# Altium PCB MAINBOARD.PcbDoc
Units mm, origin at the board's own origin, x right, y up, seen from the top; angles counter-clockwise.
Board outline 139.93 x 91.03 mm, 2 copper layers (Top Layer, Bottom Layer); 29 components, 56 nets, 161 pads, 43 vias.
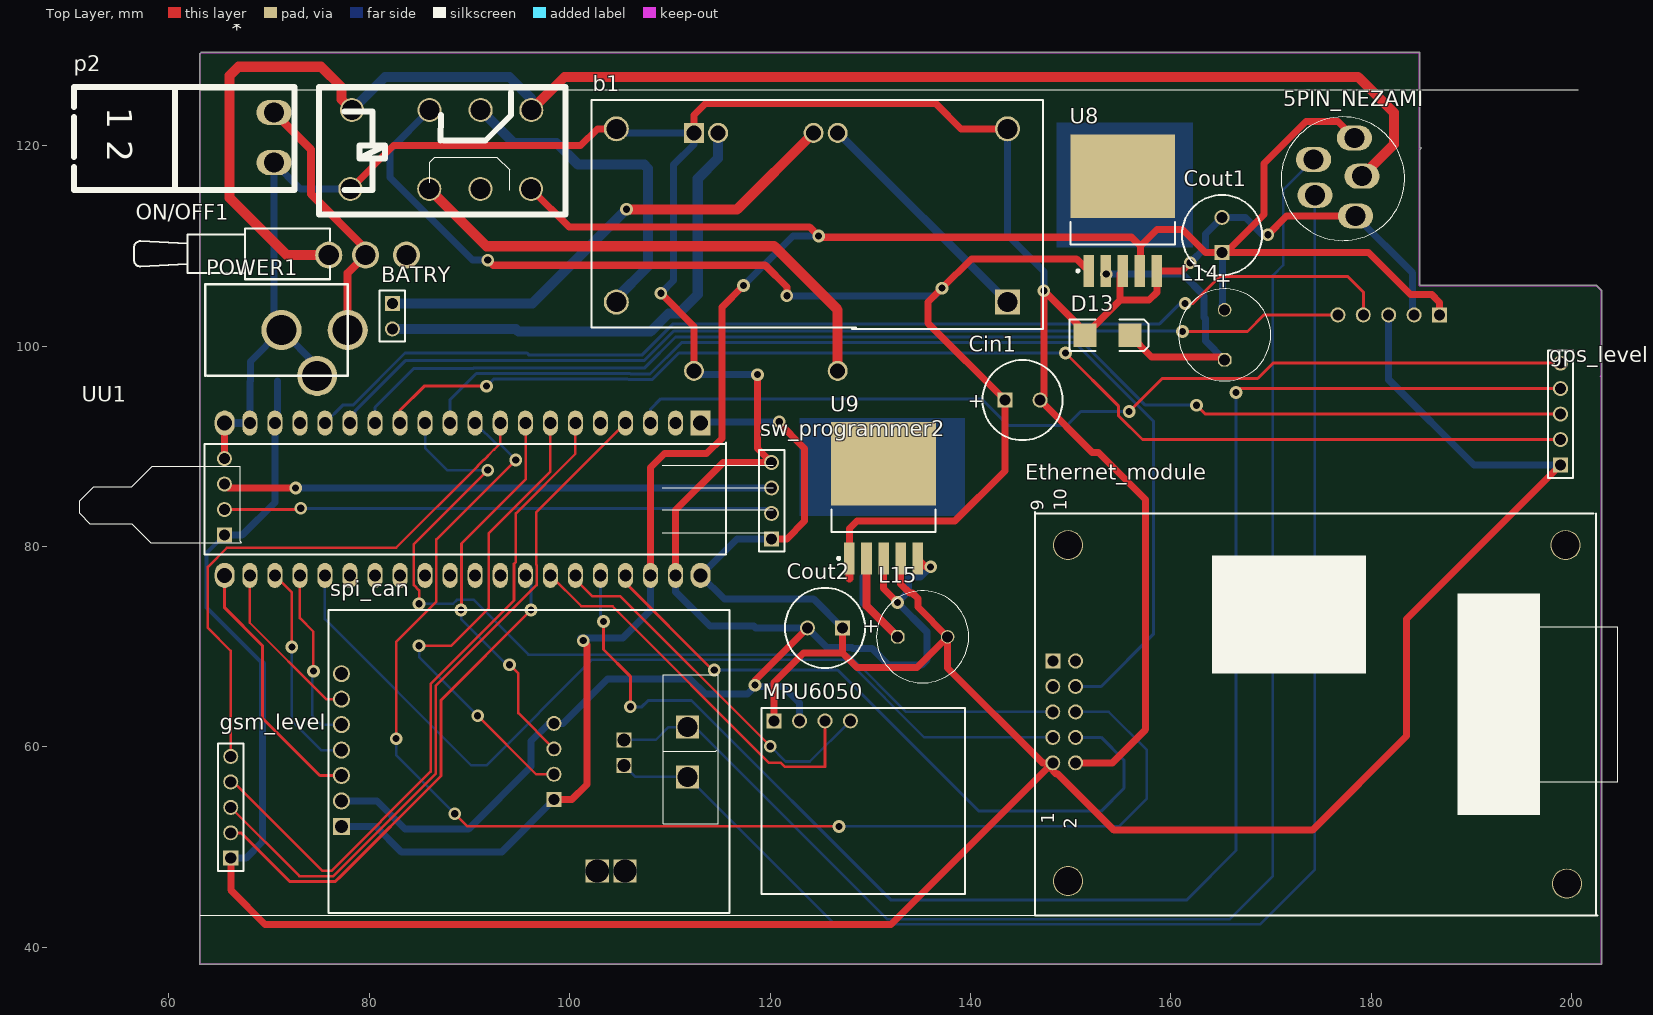
[diagram p0: Top Layer view]
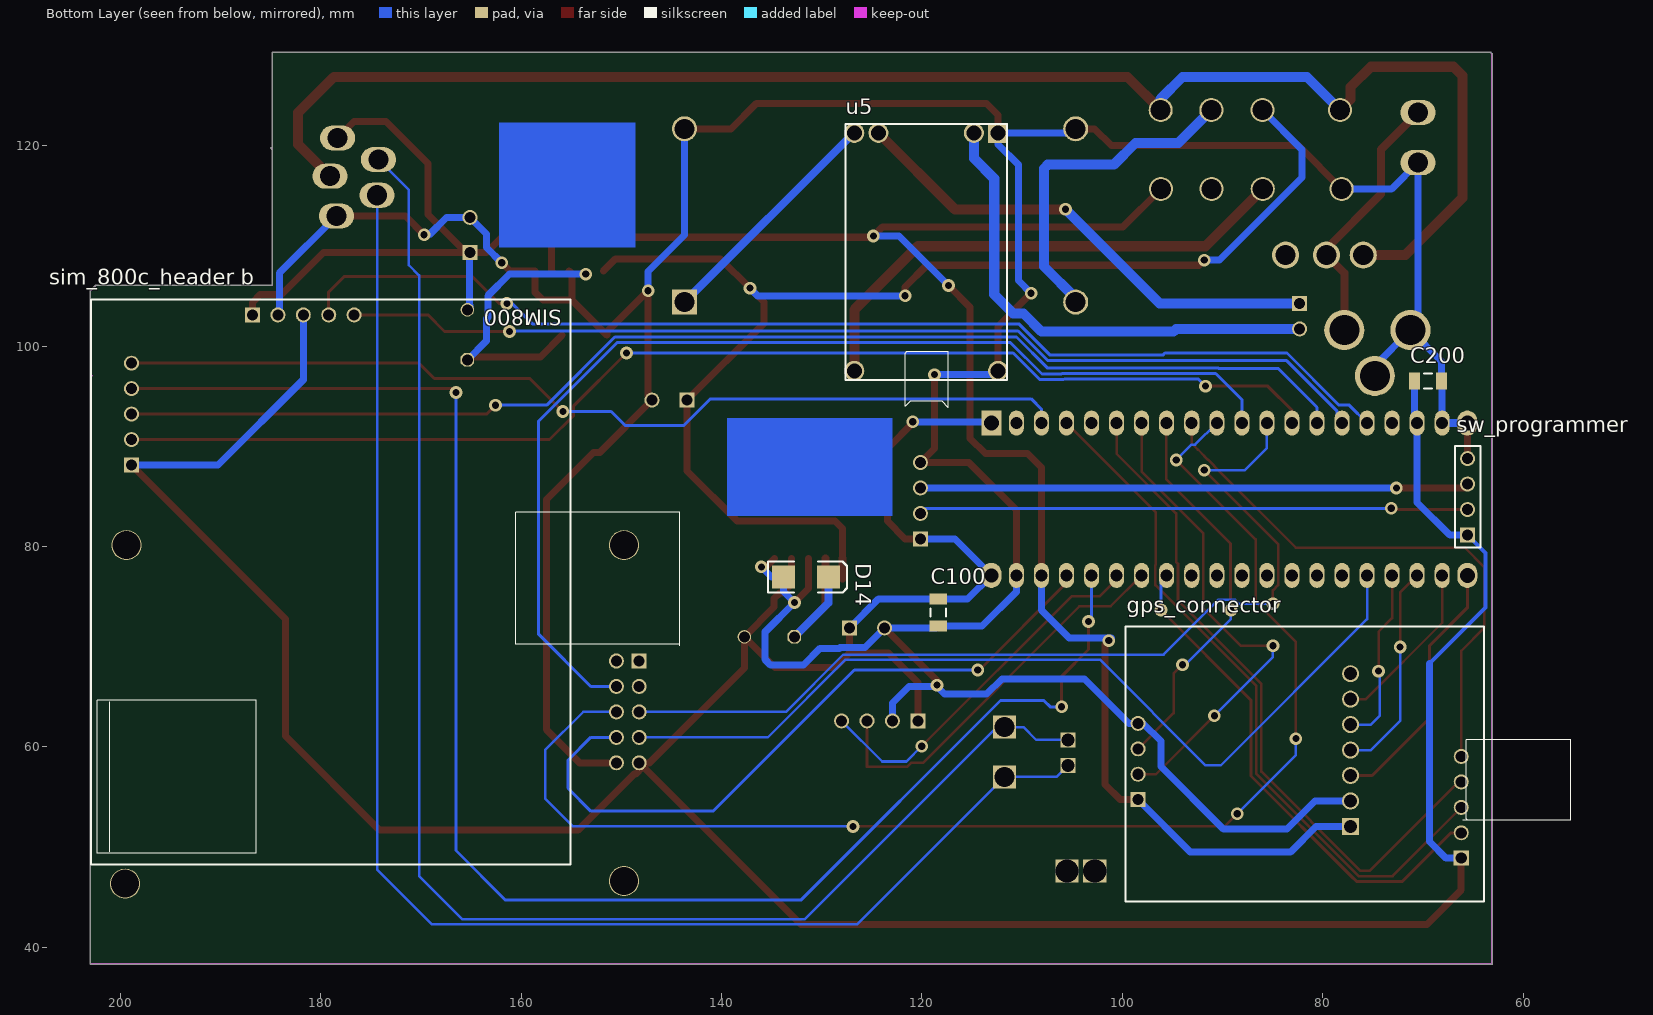
[diagram p1: Bottom Layer view, seen from below]

## Layer stack, top to bottom
Top Solder: solder mask 0.0102, Solder Resist, Dk 3.5
Top Layer: signal copper 0.0356
Dielectric 1: dielectric 0.32, FR-4, Dk 4.8
Bottom Layer: signal copper 0.0356
Bottom Solder: solder mask 0.0102, Solder Resist, Dk 3.5

## Board outline
63.069,38.354 ccw(c63.119,38.354) 63.119,38.304 202.946,38.304 ccw(c202.946,38.354) 202.996,38.354 202.996,105.537 ccw(c202.946,105.537) 202.981,105.573 202.982,105.573 202.474,106.081 202.474,106.08 ccw(c202.438,106.045) 202.438,106.095 184.835,106.095 184.835,119.613 184.948,119.725 ccw(c184.912,119.761) 184.962,119.761 ccw(c184.912,119.761) 184.876,119.797 184.835,119.756 184.835,129.286 ccw(c184.785,129.286) 184.785,129.336 63.246,129.336 ccw(c63.246,129.286) 63.21,129.321 63.21,129.322 63.083,129.195 63.084,129.195 ccw(c63.119,129.159) 63.069,129.159

## Design rules (kind name [scope] priority, off if disabled: settings)
Clearance Clearance_3 [InNamedPolygon('1')] p1: gap=0.4 ignorepadtopadclearanceinfootprint=FALSE
Clearance Clearance_2 [InNamedPolygon('1')] p2: gap=0.4 ignorepadtopadclearanceinfootprint=FALSE
Clearance Clearance_1 [InNamedPolygon('Top Layer-No Net')] p3: gap=0.4 ignorepadtopadclearanceinfootprint=FALSE
Clearance [All] p4: gap=0.254 ignorepadtopadclearanceinfootprint=FALSE
PolygonConnect [All] p1: connectstyle=Relief reliefconductorwidth=0.254 reliefentries=4 polygonreliefangle="90 Angle" airgapwidth=0.254
RoutingVias [All] p1: holewidth=0.711 width=1.27 viastyle="Through Hole" minholewidth=0.711 minwidth=1.27 maxholewidth=0.711 maxwidth=1.27
SolderMaskExpansion [All] p1: expansion=0.102
Width Width_1 [InNet('GND') OR InNet('3.3V')   OR InNet('VBAT')  OR InNet('V12')] p1: maxlimit=1 minlimit=0.4 preferedwidth=0.8 minimp=50.000000 maximp=50.000000 favimp=50.000000
Width [All] p2: maxlimit=1 minlimit=0.254 preferedwidth=0.8 minimp=50.000000 maximp=50.000000 favimp=50.000000
30 further rules are at their usual default settings.

## Components (designator, comment, footprint, x,y, rotation, side; value= is the part's Value field where it differs from the comment)
5PIN_NEZAMI "5PIN_NEZAMI" 5PIN_NEZAMI_CAN 172.466,115.062 r270 top
* "raly_2c" RELAY12-2c-HJR1-2C 71.907,115.062 r90 top
b1 "booster" booster 143.048,104.394 r180 top
BATRY "BATTRY" HDR1X2 82.296,104.267 r270 top
C100 "100nF" 1206 118.364,73.406 r270 bottom
C200 "100nF" 1206 69.469,96.52 r180 bottom
Cin1 "470 μF; 25 V" E 145.189,94.615 r0 top value=100uF
Cout1 "220 μF; 25 V" E 165.1,111.097 r90 top value=100uF
Cout2 "220 μF; 25 V" E 125.476,71.882 r180 top value=100uF
D13 "SM5822" SMB 153.67,101.092 r0 top
D14 "SM5822" SMB 131.572,76.962 r180 bottom
Ethernet_module "Ethernet_module" ethernet_module 151.511,66.929 r90 top
gps_connector "gps_connector" GPS_PORT_MODULE 98.425,54.737 r90 bottom
gps_level "Header 5" HDR1X5 198.882,88.138 r90 top
gsm_level "Header 5" HDR1X5 66.167,48.895 r90 top
L14 "68uH 3.1A (47 33)" CAPR5-4X5 165.354,101.132 r90 top value=10mH
L15 "68uH 3.1A (47 33)" CAPR5-4X5 135.215,70.993 r0 top value=10mH
MPU6050 "MPU6050" mpu6050 120.396,62.611 r0 top
ON/OFF1 "SW-SPDT" TL36WW15050 76.073,109.22 r180 top
p2 "V12_phonix" "phoenix terminal R 2" 50.546,125.89 r270 top
POWER1 "POWER" POWERIN 71.247,101.6 r90 top
"sim_800c_header b" "sim_800c_header b" SIM800_MODULE 179.197,52.451 r180 bottom
spi_can "spi module" SPI_CAN 77.216,52.07 r90 top
sw_programmer "" HDR1X4 65.532,81.153 r90 bottom
sw_programmer2 "" HDR1X4 120.142,80.772 r90 top
u5 "charger" CHARGER 114.427,116.459 r0 bottom
U8 "LM2596S-5" TS5B_N 155.194,113.517 r90 top
U9 "LM2596S-3.3" TS5B_N 131.318,84.815 r90 top
UU1 "STM32F103C8T6" header_board_st_40 113.065,92.329 r270 top

## Footprints (in the part's own frame and the unit in brackets; to place one, negate y for a bottom-side part, rotate by r counter-clockwise, add the part's x,y. Pads: shape width x height; smd on the part's side, far side on the other; paste and mask are expansions set on the pad)
5PIN_NEZAMI_CAN [mm]
  oval 2.5x3.5 hole 2: 1(-1.905,6.604) 2(-5.715,5.842) 3(-3.556,1.778) 4(0,1.905) 5(2.065,5.969)
  silkscreen extent -7.82,-1.46 4.51,10.86
1206 [mm] "Chip Capacitor, Body 3.2x1.6mm, IPC High Density"
  rect 1.1x1.7 smd: 1(-1.35,0) 2(1.35,0)
  silkscreen extent -0.4,-0.75 0.4,0.75, body extent -1.7,-0.9 1.7,0.9, height 1.3
booster [mm]
  rect 2.5x2.5 hole 2: 1(-0.635,0)
  round 2.5 hole 2: 2(-0.635,-17.3) 3(38.4,0) 4(38.4,-17.3)
  silkscreen extent -4.19,-20.19 40.89,2.67
CAPR5-4X5 [mm]
  oct 1.35x1.35 hole 1.1: 1(-2.5,0)
  round 1.35 hole 1.1: 2(2.5,0)
  silkscreen extent -4.6,-4.6 4.6,4.6
CHARGER [mm]
  round 2 hole 1.5: 1(-2.032,18.923) 2(12.319,18.923) 3(12.319,-4.826) 4(9.906,-4.826) 5(0.381,-4.826)
  rect 2x2 hole 1.5: 6(-2.032,-4.826)
  silkscreen extent -2.92,-5.71 13.21,22.61
E [mm]
  rect 1.5x1.5 hole 1.1: 1(-1.75,0)
  round 1.5 hole 1.1: 2(1.75,0)
  silkscreen extent -4,-4 4,4
ethernet_module [mm] "Connector; Header; 5x2 Position"
  rect 1.5x1.5 hole 1.1: 1(1.651,3.302)
  round 1.5 hole 1.1: 2(1.651,1.016) 3(-0.889,3.302) 4(-0.889,1.016) 5(-3.429,3.302) 6(-3.429,1.016) 7(-5.969,3.302) 8(-5.969,1.016) 9(-8.509,3.302) 10(-8.509,1.016)
  round 3 hole 2.8: 11(-20.574,-48.006) 11(-20.32,1.778) 11(13.208,1.778) 11(13.208,-47.879)
  silkscreen extent -23.75,-53.09 16.51,5.08
GPS_PORT_MODULE [mm] "Connector; Header; 4 Position"
  rect 1.5x1.5 hole 1.1: 1(0,0)
  round 1.5 hole 1.1: 2(2.54,0) 3(5.08,0) 4(7.62,0)
  silkscreen extent -10.16,-43.18 17.27,1.27
HDR1X2 [mm] "Connector; Header; 2 Position"
  rect 1.5x1.5 hole 1.1: 1(0,0)
  round 1.5 hole 1.1: 2(2.54,0)
  silkscreen extent -1.27,-1.27 3.81,1.27
HDR1X4 [mm] "Connector; Header; 4 Position"
  rect 1.5x1.5 hole 1.1: 1(0,0)
  round 1.5 hole 1.1: 2(2.54,0) 3(5.08,0) 4(7.62,0)
  silkscreen extent -1.27,-1.27 8.89,1.27
HDR1X5 [mm] "Connector; Header; 5 Position"
  rect 1.5x1.5 hole 1.1: 1(0,0)
  round 1.5 hole 1.1: 2(2.54,0) 3(5.08,0) 4(7.62,0) 5(10.16,0)
  silkscreen extent -1.27,-1.27 11.43,1.27
header_board_st_40 [mm]
  rect 2.5x2 hole 1.5: 1(0,0)
  oval 2.5x1.5 hole 1.2: 2(0,-2.5) 3(0,-5) 4(0,-7.5) 5(0,-10) 6(0,-12.5) 7(0,-15) 8(0,-17.5) 9(0,-20) 10(0,-22.5) 11(0,-25) 12(0,-27.5) 13(0,-30) 14(0,-32.5) 15(0,-35) 16(0,-37.5) 17(0,-40) 18(0,-42.5) 19(0,-45) 22(15.2,-45) 23(15.2,-42.5) 24(15.2,-40) 25(15.2,-37.5) 26(15.2,-35) 27(15.2,-32.5) 28(15.2,-30) 29(15.2,-27.5) 30(15.2,-25) 31(15.2,-22.5) 32(15.2,-20) 33(15.2,-17.5) 34(15.2,-15) 35(15.2,-12.5) 36(15.2,-10) 37(15.2,-7.5) 38(15.2,-5) 39(15.2,-2.5)
  oval 2.5x2 hole 1.5: 20(0,-47.5) 21(15.2,-47.5)
  oval 2.5x2 hole 1.4: 40(15.2,0)
  silkscreen extent 1.96,-61.98 13.11,7.24
mpu6050 [mm] "Connector; Header; 8 Position"
  rect 1.5x1.5 hole 1.1: 1(0,0)
  round 1.5 hole 1.1: 2(2.54,0) 3(5.08,0) 4(7.62,0)
  silkscreen extent -1.27,-17.27 19.05,1.27
"phoenix terminal R 2" [mm] "2 Right terminals"
  oval 2.5x3.5 hole 2: 1(2.573,19.939) 2(7.573,19.939)
  silkscreen extent 0,0 10.29,22
POWERIN [mm]
  round 4 hole 3: 1(0.007,-6.593) 2(0.007,0.011) 3(-4.565,-3.545)
  silkscreen extent -4.56,-6.59 4.58,7.63
RELAY12-2c-HJR1-2C [mm]
  round 2.4 hole 2: 1(8.509,-6.35) 4(8.509,-14.097) 6(8.509,-19.202) 8(8.509,-24.257) 9(0.635,-24.232) 11(0.635,-19.177) 13(0.635,-14.072) 16(0.635,-6.198)
  silkscreen extent -1.9,-27.69 10.8,-3.05
SIM800_MODULE [mm] "Connector; Header; 5 Position"
  rect 1.5x1.5 hole 1.1: 1(-7.62,50.673)
  round 1.5 hole 1.1: 2(-5.08,50.673) 3(-2.54,50.673) 4(0,50.673) 5(2.54,50.673)
  silkscreen extent -23.75,-4.19 35.05,52.2
SMB [mm]
  rect 2.3x2.3 smd: 1(-2.25,0) 2(2.25,0)
  silkscreen extent -3.8,-1.55 4.1,1.55
SPI_CAN [mm] "Connector; Header; 8 Position"
  rect 1.7x1.7 hole 1.3: 1(0,0)
  round 1.7 hole 1.3: 2(2.54,0) 3(5.08,0) 4(7.62,0) 5(10.16,0) 6(12.7,0) 7(15.24,0)
  rect 2.3x2.3 hole 2: 8(4.953,-34.544) 9(9.906,-34.544)
  rect 1.5x1.5 hole 1.3: 8(6.096,-28.194) 9(8.636,-28.194)
  rect 2.3x2.3 hole 2.3: 10(-4.445,-25.527) 11(-4.445,-28.321)
  silkscreen extent -8.64,-38.73 21.59,1.27
TL36WW15050 [mm] "Switch; 4 Leads"
  round 2.7 hole 2: 1(0.127,0.127) 2(-3.556,0.127) 3(-7.62,0.127)
  silkscreen extent 0,-2.54 19.56,2.54
TS5B_N [mm]
  rect 3.2x1.05 smd: 1(-6,3.4) 2(-6,1.7) 3(-6,0) 4(-6,-1.7) 5(-6,-3.4)
  rect 8.3x10.45 smd: 6(3.45,0)
  silkscreen extent -6.12,-5.2 -1.1,5.2, body extent -3.35,-5.2 6.05,5.2, height 4.65

## Part data
5PIN_NEZAMI: "Header, 8-Pin", LatestRevisionDate=17-Jul-2002, LatestRevisionNote="Re-released for DXP Platform.", Publisher="Altium Limited"
BATRY p2: library part "Header 2", "Header, 2-Pin", LatestRevisionDate=17-Jul-2002, LatestRevisionNote="Re-released for DXP Platform.", Publisher="Altium Limited"
C100 C200: library part Cap-Bipolar, "Bipolar Capacitor", Voltage=100V, Adding Date=1387/12/20, Designer="Saeid Jorablo", Organazation=ControTec
Cin1 Cout1 Cout2: library part 94SH107X0016EBP, "Solid Aluminum Capacitor with Organic Semiconductor Electrolyte: 100uF, 16V, Bulk Pack", ComponentLink1Description="Manufacturer Link", ComponentLink1URL=http://www.vishay.com/, ComponentLink2Description=Datasheet, ComponentLink2URL=http://www.vishay.com/docs/90006/94sh.pdf, DatasheetDocument=23-May-2001, DrillSize="Nominal, Rounded to the nearest 0.1mm", Note="Part Numbers shown are for ± 20% capacitance tolerance (X0).", PackageReference=E, PCB_Layout="Complies with Manufacturer's Recommendation.", Published=19-Mar-2004, Publisher="Altium Limited"
D13 D14: library part "D Schottky", "Schottky Diode", Code_JEDEC=DO-214-AA, LatestRevisionDate=17-Jul-2002, LatestRevisionNote="Re-released for DXP Platform.", PackageDescription="DO-214-AA/SMB; 2 C-Bend Leads; Body 5.3 x 3.6 mm, inc. leads (LxW)", PackageReference=SMB, Published=8-Jun-2000, Publisher="Altium Limited"
Ethernet_module: library part "Header 5X2", "Header, 5-Pin, Dual row", LatestRevisionDate=17-Jul-2002, LatestRevisionNote="Re-released for DXP Platform.", Publisher="Altium Limited"
gps_connector sw_programmer sw_programmer2: library part "Header 4", "Header, 4-Pin", LatestRevisionDate=17-Jul-2002, LatestRevisionNote="Re-released for DXP Platform.", Publisher="Altium Limited"
gps_level gsm_level: "Header, 5-Pin", LatestRevisionDate=17-Jul-2002, LatestRevisionNote="Re-released for DXP Platform.", Publisher="Altium Limited"
L14 L15: library part Inductor, "Inductor", Code_IEC=1005, Code_JEITA=0402, LatestRevisionDate=29-May-2009, LatestRevisionNote="IPC-7351 Footprint Added.", PackageDescription="Chip Inductor", PackageReference=0402-A, Published=8-Jun-2000, Publisher="Altium Limited"
MPU6050: library part "Header 8", "Header, 8-Pin", LatestRevisionDate=17-Jul-2002, LatestRevisionNote="Re-released for DXP Platform.", Publisher="Altium Limited"
ON/OFF1: "SPDT Subminiature Toggle Switch, Right Angle Mounting, Vertical Actuation", ComponentLink1Description="Manufacturer Link", ComponentLink1URL=http://www.apem.com, DatasheetVersion=05-Dec-2000, LatestRevisionDate=17-Dec-2003, LatestRevisionNote="Schematic revised, PCB Footprint replaced.", PackageDescription="Switch; 4 Leads", PackageReference=TL36WW15050, Published=24-Mar-1999, Publisher="Altium Limited"
POWER1: library part PWR2.5, "Low Voltage Power Supply Connector", ComponentLink1Description="Manufacturer Link", ComponentLink1URL=http://domino.kycon.com/internet/Products.html, DatasheetDocument=09-May-2002, Published=17-Dec-2003, Publisher="Altium Limited"
u5: library part 03962A
U8 U9: library part LM2596S-ADJ, "SIMPLE SWITCHER® Power Converter 150 KHz 3A Step-Down Voltage Regulator, 5-pin TO-263", Manufacturer="National Semiconductor", PackageTopMarking="NSUZXYTTE#*LM2596S*-ADJ P+", PowerWise=N, Supplier Part Number 1=1523864, Code_JEDEC=MO-169-AB, ComponentLink1Description="LM2596 Datasheet", ComponentLink1URL=http://www.national.com/ds/LM/LM2596.pdf, ComponentLink2Description="LM2596 Web Page", ComponentLink2URL=http://www.national.com/pf/LM/LM2596.html, ComponentLink3Description="TS5B Package Page", ComponentLink3URL=http://www.national.com/packaging/folders/ts5b.html, CompType=Switcher, DatasheetVersion=May-2002, PackageDescription="TO-263, Molded, .400 x .390 x .180in, 5 Lead, .067in Pitch, Surface Mount", PackageReference=TS5B, PackageVersion="revD, Apr-2005", PartNumber=LM2596S-ADJ, PinCount=5, Published=4-Dec-2008, Publisher="Altium Limited", RoHS=N, Supplier 1=Farnell, Supplier 2=Farnell, Supplier Part Number 2=9494367
UU1: "ARM Cortex-M3 32-bit MCU, 64 KB Flash, 20 KB Internal RAM, 37 I/Os, 48-pin LQFP, -40 to 85 degC, Tray", I/Os (High Current)=37, Operating Frequency(F) (Processor speed) (MHz)=72, Supplier Part Number 1=497-6063-ND, Supply Voltage(Vcc) min (V)=2, A/D Converter="2x12-bit (10 Channel)", ComponentLink1Description="Manufacturer URL", ComponentLink1URL=http://www.st.com/web/en/home.html, ComponentLink2Description=Datasheet, ComponentLink2URL=http://www.st.com/st-web-ui/static/active/en/resource/technical/document/datasheet/CD00161566.pdf, ComponentLink3Description="Package Specification", ComponentLink3URL=http://www.st.com/st-web-ui/static/active/en/resource/technical/document/datasheet/DM00058181.pdf, Core="ARM Cortex-M3", DatasheetVersion="Rev. 16", FLASH Size (Prog) (kB)=64, Internal RAM Size (kB)=20, Mounting Technology="Surface Mount", PackageDescription="48-Pin Low Profile Quad Flat Package, 7 x 7 mm Body, 0.5 mm Pitch", PackageReference=LQFP48, PackageVersion="Rev. 6, 06/2013", Packing=Tray, PartNumber=STM32F103C8T6, Supplier 1=Digi-Key, Supplier 2=Farnell, Supplier 3=Newark, Supplier 4=Newark, Supplier 5=Mouser, Supplier Part Number 2=1447637, Supplier Part Number 3=59M2182, Supplier Part Number 4=57P1222, Supplier Part Number 5=511-STM32F103C8T6

## Via types
v1: diameter 1.27, hole 0.711, Top Layer to Bottom Layer, 43 vias

## Nets (pads, with @x,y where several pads share a name; then routed paths per layer and width w, separated by ;. In a path a pad name is that pad's centre, name@x,y a point inside that pad or via, vN(x,y) a via of type N, cw(c..) or ccw(c..) an arc to the next point about the centre after c; other vN are vias at no path point)
3.3V: "sim_800c_header b.3" C100.1 C200.1 Cout2.1 Ethernet_module.9 gps_level.1 gsm_level.1 L15.2 MPU6050.1 sw_programmer2.1 sw_programmer.1 U9.4 UU1.1 UU1.18 UU1.40 | length 359.2
  Top Layer w0.7: gsm_level.1 66.167,45.72 69.596,42.291 132.08,42.291 Ethernet_module.9@147.828,58.039 ; sw_programmer2.1 121.666,80.772 123.444,82.55 123.444,89.789 ; MPU6050.1 120.396,66.421 123.345,69.37 127.226,69.37 ; v1(120.904,92.456) v1@120.777,92.456 ; Cout2.1 127.226,69.37 ; U9.4 133.018,76.278 133.954,75.342 134.208,75.342 134.747,74.803 134.747,73.961 L15.2 ; gps_level.1 183.515,72.771 183.515,61.087 174.117,51.689 154.305,51.689 148.717,57.277 148.59,57.277 ; v1@120.777,92.456 123.444,89.789 ; v1@120.777,92.456 123.444,89.789 ; 127.226,69.37 128.651,67.945 134.667,67.945 L15.2 ; L15.2 137.715,67.898 147.193,58.42 Ethernet_module.9 Ethernet_module.9@147.828,58.039 ; Ethernet_module.9@147.828,58.039 148.59,57.277 ; Ethernet_module.9@147.828,58.039 148.59,57.277
  Bottom Layer w0.4: sw_programmer.1 63.754,79.375 63.754,73.914 69.342,68.326
  Bottom Layer w0.7: sw_programmer.1 67.31,81.153 70.565,84.408 UU1.18 70.819,92.583 C200.1 ; gsm_level.1 67.691,48.895 69.342,50.546 69.342,68.326 ; UU1.1 113.192,92.456 v1(120.904,92.456) ; sw_programmer2.1 116.708,80.772 UU1.40 115.438,74.756 C100.1 124.352,74.756 Cout2.1 ; 181.737,103.124 181.737,96.647 190.246,88.138 gps_level.1
5V: 5PIN_NEZAMI.2 "sim_800c_header b.1" *.9 Cout1.1 gps_connector.1 L14.2 spi_can.1 U8.4 UU1.38 | length 232.1
  Top Layer w0.7: *.9 99.949,111.887 123.952,111.887 v1(124.841,110.998) 124.968,110.871 156.083,110.871 156.972,109.982 ; gps_connector.1 100.203,54.737 101.727,56.261 101.727,70.231 v1(101.346,70.612) ; UU1.38 108.065,87.872 109.474,89.281 113.665,89.281 115.189,90.805 115.189,103.886 v1(117.348,106.045) ; U8.4 156.972,107.595 156.972,109.982 ; 5PIN_NEZAMI.2 176.657,122.428 173.482,122.428 169.291,118.237 169.291,113.157 Cout1.1@165.481,109.347 ; 186.817,103.124 186.817,104.375 186.036,105.156 183.896,105.156 179.705,109.347 Cout1.1@165.481,109.347 ; 156.972,109.982 158.623,111.633 161.163,111.633 163.449,109.347 Cout1.1 Cout1.1@165.481,109.347
  Bottom Layer w0.7: spi_can.1 80.645,52.07 83.185,49.53 93.218,49.53 gps_connector.1 ; v1(101.346,70.612) v1@101.061,70.897 ; UU1.38 108.065,73.648 105.314,70.897 ; v1(117.348,106.045) 122.301,110.998 v1(124.841,110.998) ; Cout1.1 165.134,109.313 165.134,104.121 165.1,104.087 165.1,103.886 L14.2 ; v1@101.061,70.897 105.314,70.897 ; v1@101.061,70.897 105.314,70.897
12V: 5PIN_NEZAMI.1 *.1 *.8 ON/OFF1.1 | length 157.5
  Top Layer w1: ON/OFF1.1 71.755,109.093 66.04,114.808 66.04,127 66.929,127.889 75.184,127.889 77.216,125.857 77.216,124.612 *.1 ; *.8 99.466,126.873 178.689,126.873 182.245,123.317 182.245,120.142 5PIN_NEZAMI.1
  Bottom Layer w1: *.1 81.559,126.873 93.98,126.873 96.164,124.689 *.8
ADO: 
BATTRY+: BATRY.1 u5.4 | length 49.1
  Top Layer w1: v1(105.664,113.665) 116.713,113.665 u5.4
  Bottom Layer w1: BATRY.1 96.266,104.267 v1(105.664,113.665)
BATTRY-: BATRY.2 u5.5 | length 49.1
  Bottom Layer w1: BATRY.2 94.615,101.727 94.869,101.473 108.077,101.473 109.863,103.259 110.879,103.259 112.776,105.156 112.776,116.713 114.808,118.745 u5.5
CAN+: 5PIN_NEZAMI.4 spi_can.8 | length 145.1
  Bottom Layer w0.254: spi_can.8@105.41,58.166 106.553,57.023 111.76,57.023 126.492,42.291 168.91,42.291 174.371,47.752 5PIN_NEZAMI.4
CAN-: 5PIN_NEZAMI.3 spi_can.9 | length 148.2
  Bottom Layer w0.254: spi_can.9@105.41,60.706 108.585,60.706 109.855,61.976 111.76,61.976 112.522,61.976 131.699,42.799 165.862,42.799 170.18,47.117 170.18,107.061 171.196,108.077 171.196,115.57 5PIN_NEZAMI.3
CHARJER_5V: *.13 u5.2 | length 51.9
  Top Layer w1: *.13 91.702,109.974 120.404,109.974 126.746,103.632 u5.2
CLK: Ethernet_module.1
CS: Ethernet_module.7 UU1.25 | length 90.6
  Bottom Layer w0.254: UU1.25 75.565,72.771 90.17,58.166 91.694,58.166 102.235,68.707 127.635,68.707 135.382,60.96 Ethernet_module.7
CS2: spi_can.3 UU1.21 | length 26.1
  Top Layer w0.3: UU1.21 65.565,73.881 69.342,70.104 69.342,62.865 75.057,57.15 spi_can.3
Debug_RX1: UU1.27
Debug_TX1: UU1.26
GND: 5PIN_NEZAMI.5 "sim_800c_header b.2" *.16 b1.2 b1.4 C100.2 C200.2 Cin1.2 Cout1.2 Cout2.2 D13.1 D14.1 Ethernet_module.10 gps_connector.4 MPU6050.2 p2.2 POWER1.2 POWER1.3 spi_can.2 sw_programmer2.4 sw_programmer.4 u5.1 u5.6 U8.3 U8.5 U9.3 U9.5 UU1.19 UU1.20 UU1.39 | length 427.1
  Top Layer w0.7: sw_programmer.4 65.532,92.296 UU1.20 ; *.16 82.423,120.015 101.092,120.015 102.771,121.694 b1.4 ; v1(109.093,105.283) 112.395,101.981 u5.1 ; UU1.39 110.565,83.641 115.316,88.392 sw_programmer2.4 118.745,89.789 v1(118.745,97.155) ; u5.6 112.395,123.063 113.538,124.206 136.525,124.206 139.037,121.694 b1.2 ; v1(118.491,66.167) 118.491,66.647 Cout2.2 ; U9.3 131.318,75.819 v1(132.715,74.422) ; U9.5 135.555,77.978 v1(136.017,77.978) ; Ethernet_module.10 154.178,58.42 157.48,61.722 157.48,84.709 152.781,89.408 152.146,89.408 Cin1.2 147.32,94.996 v1(147.32,105.537) 151.42,101.437 D13.1 154.94,104.612 ; U8.3 154.94,107.263 154.94,104.612 ; v1(161.925,108.331) 161.111,107.517 U8.5 158.594,105.381 157.825,104.612 154.94,104.612 ; v1(169.672,111.125) 171.544,112.997 5PIN_NEZAMI.5
  Bottom Layer w0.7: UU1.19 68.065,96.466 C200.2 68.119,98.49 POWER1.2 ; POWER1.3 74.792,98.051 POWER1.2 ; spi_can.2 80.772,54.61 83.566,51.816 89.916,51.816 96.139,58.039 96.139,60.579 97.917,62.357 gps_connector.4 99.314,62.357 103.759,66.802 112.014,66.802 113.538,65.278 117.729,65.278 118.491,66.04 v1(118.491,66.167) 118.618,66.04 121.285,66.04 122.936,64.389 MPU6050.2 ; *.16 73.105,115.697 p2.2 70.485,102.358 POWER1.2 ; b1.4 105.057,121.285 u5.6 112.395,120.142 110.363,118.11 110.363,106.553 v1(109.093,105.283) ; UU1.39 110.565,75.49 113.999,72.056 C100.2 118.538,71.882 Cout2.2 125.662,69.946 128.148,69.946 128.244,69.85 130.175,69.85 131.826,68.199 135.128,68.199 135.636,68.707 135.636,71.501 v1(132.715,74.422) 133.822,75.529 D14.1 135.001,76.962 v1(136.017,77.978) ; u5.1 112.776,97.155 v1(118.745,97.155) ; b1.2 143.683,111.079 147.32,107.442 v1(147.32,105.537) ; v1(161.925,108.331) 163.449,109.855 163.449,111.196 Cout1.2 167.442,112.847 169.164,111.125 v1(169.672,111.125) ; 5PIN_NEZAMI.5 184.131,107.301 184.131,103.27 184.277,103.124
  Bottom Layer w0.8: UU1.20 UU1.19
GPS_rx: gps_connector.2 UU1.7 | length 49
  Top Layer w0.254: v1(84.963,70.104) 88.178,70.104 91.934,73.86 91.934,81.349 98.065,87.48 UU1.7 ; v1(90.805,63.119) 96.647,57.277 gps_connector.2
  Bottom Layer w0.254: v1(84.963,70.104) 84.963,68.961 v1(90.805,63.119)
GPS_tx: gps_connector.3 UU1.8 | length 39.2
  Top Layer w0.254: v1(89.154,73.66) 89.196,73.702 89.196,80.306 95.631,86.741 95.631,92.263 UU1.8 ; v1(93.98,68.199) 94.869,67.31 94.869,63.373 gps_connector.3
  Bottom Layer w0.254: v1(89.154,73.66) 89.154,72.771 93.726,68.199 v1(93.98,68.199)
INT: 
LED0: UU1.2
LED1: gps_level.2 UU1.13 | length 123.7
  Top Layer w0.3: UU1.13 83.065,93.606 85.471,96.012 v1(91.694,96.012) ; v1(149.479,99.314) 154.79,94.003 154.79,93.042 157.154,90.678 gps_level.2
  Bottom Layer w0.3: v1(91.694,96.012) 92.41,96.728 105.781,96.728 105.843,96.666 108.244,96.666 110.892,99.314 v1(149.479,99.314)
LED2: gps_level.3 UU1.14 | length 126
  Top Layer w0.3: v1(162.56,94.107) 163.449,93.218 gps_level.3
  Bottom Layer w0.3: UU1.14 80.565,93.9 84.455,97.79 90.403,97.79 90.449,97.836 107.488,97.836 110.559,100.907 150.647,100.907 157.447,94.107 v1(162.56,94.107)
LED3: gps_level.4 UU1.36 | length 163.6
  Top Layer w0.3: v1(103.378,72.517) 103.378,69.723 106.045,67.056 v1(106.045,64.008) ; v1(166.497,95.377) 166.878,95.758 gps_level.4
  Bottom Layer w0.3: UU1.36 103.065,72.83 v1(103.378,72.517) ; v1(106.045,64.008) 107.188,64.008 107.823,64.643 112.141,64.643 132.08,44.704 161.544,44.704 166.497,49.657 v1(166.497,95.377)
LED4: gps_level.5 UU1.3 | length 96.3
  Top Layer w0.3: v1(155.829,93.472) 159.131,96.774 168.656,96.774 170.18,98.298 gps_level.5
  Bottom Layer w0.3: UU1.3 108.065,93.714 109.093,94.742 128.397,94.742 141.097,94.742 143.764,92.075 149.606,92.075 151.003,93.472 v1(155.829,93.472)
LED5: gsm_level.2 UU1.33 | length 51.3
  Top Layer w0.3: gsm_level.2 67.183,51.435 72.032,46.586 76.63,46.586 77.138,47.094 87.145,57.101 87.145,64.666 v1(96.139,73.66)
  Bottom Layer w0.3: UU1.33 96.139,76.555 v1(96.139,73.66)
LED6: gsm_level.3 UU1.4 | length 70.4
  Top Layer w0.254: gsm_level.3 73.025,47.117 76.41,47.117 86.614,57.321 86.614,66.079 96.696,76.161 96.696,78.146 96.647,78.195 96.647,83.411 UU1.4
LED7: gsm_level.4 UU1.6 | length 68.5
  Top Layer w0.254: gsm_level.4 66.421,56.515 75.311,47.625 76.2,47.625 86.106,57.531 86.106,66.294 94.434,74.622 94.434,78.278 94.615,78.459 94.615,83.312 100.565,89.262 UU1.6
LED8: gsm_level.5 UU1.9 | length 56.3
  Top Layer w0.254: gsm_level.5 66.167,69.596 63.881,71.882 63.881,77.978 65.786,79.883 82.677,79.883 90.805,88.011 90.805,88.051 91.4,88.646 91.44,88.646 91.821,89.027 91.821,89.067 92.416,89.662 92.456,89.662 93.065,90.271 UU1.9
NetD13_2: D13.2 L14.1 U8.2 | length 28.4
  Top Layer w0.7: D13.2 158.079,98.933 165.053,98.933 L14.1
  Bottom Layer w0.7: v1(153.543,107.188) 161.163,107.188 163.322,105.029 163.322,102.87 163.449,102.743 163.449,100.537 L14.1
NetD14_2: D14.2 L15.1 U9.2 | length 16.5
  Top Layer w0.8: U9.2 129.618,74.09 L15.1
  Bottom Layer w0.8: D14.2 129.322,74.386 L15.1
not_use2: UU1.31
not_use3: UU1.32
not_use5: UU1.28
not_use6: UU1.29
not_use7: UU1.30
NT: Ethernet_module.2
RST_ETHERNET: Ethernet_module.8 UU1.37 | length 69.5
  Top Layer w0.3: UU1.37 105.565,76.376 114.25,67.691 v1(114.427,67.691)
  Bottom Layer w0.3: v1(114.427,67.691) 126.746,67.691 140.843,53.594 153.035,53.594 155.321,55.88 155.321,58.674 153.035,60.96 Ethernet_module.8
SCL: MPU6050.3 UU1.34 | length 39.9
  Top Layer w0.254: UU1.34 101.153,74.041 104.267,74.041 119.888,58.42 121.071,58.42 121.452,58.039 125.476,58.039 MPU6050.3
SDA: MPU6050.4 UU1.35 | length 37.1
  Top Layer w0.254: UU1.35 100.565,76.727 102.235,75.057 105.029,75.057 v1(120.015,60.071)
  Bottom Layer w0.254: v1(120.015,60.071) 121.539,58.547 123.952,58.547 MPU6050.4
SIM_RX3: "sim_800c_header b.4" UU1.16 | length 113.5
  Top Layer w0.3: v1(161.417,104.267) 162.179,104.267 164.846,106.934 177.673,106.934 179.197,105.41 179.197,103.124
  Bottom Layer w0.3: UU1.16 77.343,94.107 78.359,94.107 83.566,99.314 95.75,99.314 95.958,99.106 107.191,99.106 110.32,102.235 158.877,102.235 161.417,104.775 v1(161.417,104.267)
SIM_TX3: "sim_800c_header b.5" UU1.15 | length 103.5
  Top Layer w0.3: v1(161.163,101.473) 167.64,101.473 169.291,103.124 176.657,103.124
  Bottom Layer w0.3: UU1.15 78.588,92.852 78.588,93.553 83.587,98.552 107.421,98.552 110.392,101.523 161.113,101.523 v1(161.163,101.473)
SPI1_MISO: Ethernet_module.4 UU1.11 | length 109.3
  Bottom Layer w0.3: UU1.11 88.065,94.669 90.678,97.282 106.01,97.282 106.072,97.22 108.015,97.22 111.148,100.353 150.417,100.353 158.242,92.528 158.242,71.247 153.035,66.04 Ethernet_module.4
SPI1_MOSI: Ethernet_module.5 UU1.12 | length 94.3
  Top Layer w0.254: v1(84.963,74.295) 84.963,75.632 84.434,76.161 84.434,80.243 v1(91.821,87.63)
  Bottom Layer w0.254: v1(84.963,74.295) 88.352,74.295 88.733,74.676 90.424,74.676 95.885,69.215 127.845,69.215 133.56,63.5 Ethernet_module.5 ; UU1.12 85.565,89.822 87.757,87.63 v1(91.821,87.63)
SPI1_SCK: Ethernet_module.6 UU1.10 | length 132.5
  Top Layer w0.254: v1(82.677,60.833) 82.677,70.485 86.696,74.504 86.696,80.727 v1(94.615,88.646) ; v1(88.519,53.34) 89.789,52.07 v1(126.873,52.07)
  Bottom Layer w0.254: v1(82.677,60.833) 82.677,59.182 v1(88.519,53.34) ; UU1.10 92.724,90.17 93.091,90.17 v1(94.615,88.646) ; v1(126.873,52.07) 154.813,52.07 157.607,54.864 157.607,59.69 153.797,63.5 Ethernet_module.6
SPI2_MISO: spi_can.4 UU1.23 | length 21.4
  Top Layer w0.254: UU1.23 72.263,75.431 v1(72.263,69.977)
  Bottom Layer w0.254: v1(72.263,69.977) 72.263,62.611 75.184,59.69 spi_can.4
SPI2_MOSI: spi_can.5 UU1.24 | length 17.9
  Top Layer w0.254: UU1.24 73.065,72.858 74.422,71.501 v1(74.422,67.564)
  Bottom Layer w0.254: v1(74.422,67.564) 74.295,67.437 74.295,63.119 75.184,62.23 spi_can.5
SPI2_SCK: spi_can.6 UU1.22 | length 17
  Top Layer w0.254: UU1.22 68.065,72.397 75.692,64.77 spi_can.6
SWCLK: sw_programmer2.3 sw_programmer.3 | length 54.8
  Top Layer w0.7: sw_programmer.3 65.913,85.852 v1(72.644,85.852)
  Bottom Layer w0.7: v1(72.644,85.852) sw_programmer2.3
SWIO: sw_programmer2.2 sw_programmer.2 | length 54.9
  Top Layer w0.3: sw_programmer.2 73.025,83.693 v1(73.152,83.82)
  Bottom Layer w0.3: v1(73.152,83.82) 119.634,83.82 sw_programmer2.2
temp_data: UU1.5
VBAT_i: b1.1 u5.3 | length 23.9
  Bottom Layer w0.8: u5.3 126.792,121.285 b1.1
VBAT_O: *.6 b1.3 | length 33.8
  Bottom Layer w1: *.6 94.412,120.269 98.679,120.269 100.838,118.11 107.442,118.11 107.823,117.729 107.823,107.95 104.648,104.775 b1.3
VCC: *.4 Cin1.1 U8.1 U9.1 | length 130.5
  Top Layer w0.7: v1(91.821,108.585) 92.329,108.077 119.507,108.077 121.666,105.918 v1(121.666,105.029) ; U9.1 127.918,81.817 128.651,82.55 138.43,82.55 143.439,87.559 Cin1.1 135.763,102.291 135.763,104.394 v1(137.16,105.791) 140.081,108.712 150.599,108.712 U8.1
  Top Layer w0.8: 127.918,76.808 U9.1
  Bottom Layer w0.7: *.4 82.042,119.609 82.042,116.84 90.297,108.585 v1(91.821,108.585) ; v1(121.666,105.029) 136.398,105.029 v1(137.16,105.791)
Vin: ON/OFF1.2 p2.1 POWER1.1 | length 26.2
  Top Layer w0.8: p2.1 74.168,119.634 74.168,115.189 79.629,109.728 ON/OFF1.2 77.84,107.304 POWER1.1
WOL: Ethernet_module.3
XCL: 
XDA: 
pads on no net: *.11 Ethernet_module.11 ON/OFF1.3 spi_can.7 spi_can.10 spi_can.11 U8.6 U9.6 UU1.17

## Keep-outs
Keep-Out Layer:
  lines w0.1: 184.912,119.761 184.785,119.634 ; 202.819,97.028 202.946,96.901 ; 184.785,106.045 184.785,115.697 ; 184.785,106.045 184.785,115.697 ; 184.785,106.045 198.882,106.045 202.438,106.045 202.946,105.537 202.946,101.981 202.946,99.949 202.946,96.901 ; 184.785,115.697 184.785,119.634 ; 184.785,119.634 184.785,129.286 63.246,129.286 63.119,129.159 63.119,38.354 202.946,38.354 202.946,96.901

## Other copper
Bottom Layer:
  rectangle: 148.59,109.855 162.179,122.301
  rectangle: 122.936,83.058 139.446,92.837

## Silkscreen, mask and mechanical layers (free items; w line width, h text height)
Top Overlay:
  lines w0.1: 63.119,43.18 195.453,43.18 ; 63.119,125.603 200.66,125.603

## Text inside footprints (layer, text, board x,y; h text height)
Cin1: Top Overlay "+" at 139.714,93.865 h1.5
Cout1: Top Overlay "+" at 165.85,105.622 h1.5 r90
Cout2: Top Overlay "+" at 130.951,72.632 h1.5 r180
Ethernet_module: Top Overlay "10" at 149.606,83.566 h1.27 r90; Top Overlay "9" at 147.32,83.566 h1.27 r90; Top Overlay "1" at 148.336,52.324 h1.27 r90; Top Overlay "2" at 150.622,51.816 h1.27 r90
p2: Top Overlay "1 2" at 53.848,123.858 h2.5 r270
"sim_800c_header b": Bottom Overlay "SIM800" at 155.956,103.632 h1.52 r180